# EAGLE board Tilt-A-Whirl_RPI-1031_BOB-v11 (EAGLE 6.2)
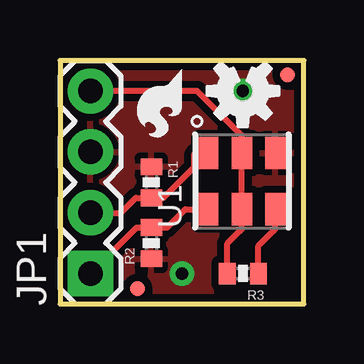
[diagram p0: board, top side]
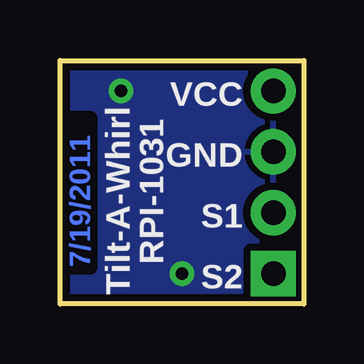
[diagram p1: board, bottom side, seen from below]

Size 10.16 x 10.16 mm. Coordinates in mm from the lower left corner, seen from the top.
Outline: 0,0 10.16,0 10.16,10.16 0,10.16 0,0
Copper layers (1*16): Top 0.035mm / dielectric 1.5mm / Bottom 0.035mm
Design rules: minimum track width 8mil, minimum drill 20mil, track to track 8mil, track to pad 8mil, pad to pad 8mil, via to via 8mil, smd to smd 8mil, copper to edge 8mil, drill to drill 8mil, minimum pad ring 12mil, minimum via ring 10mil, stop-mask expansion 4mil, vias tented up to drill 20mil, thermal gap 10mil

## Footprints (pad centres in the part's own frame; a part is rotated, then mirrored left to right if it is on the bottom)
1X04 = drill 1.016 pad 1.88 square: 1 0,0 | drill 1.016 pad 1.88: 2 2.54,0; 3 5.08,0; 4 7.62,0
FIDUCIAL-1X2.5 = smd 0.635 x 0.635: 1 0,0
0402-RES = smd 0.7 x 0.9: 1 -0.65,0; 2 0.65,0
RPI-1031 = smd 1.35 x 0.85: 1 1.22,1.445; 2 1.22,0.045; 3 1.22,-1.355; 4 -1.13,1.445; 5 -1.13,0.045; 6 -1.13,-1.355

## Placement (x,y rotation side)
JP1  [1X04]  1.27,1.27 90 top
JP2  FIDUCIAL1X2.5  [FIDUCIAL-1X2.5]  9.47,9.55 0 top
JP3  FIDUCIAL1X2.5  [FIDUCIAL-1X2.5]  3.23,0.64 0 top
JP4  LOGO-SFESK  [SFE-LOGO-FLAME]  5.08,9.78 180 top
R1  2.2k  [0402-RES]  3.81,5.08 270 top
R2  2.2k  [0402-RES]  3.81,2.54 90 top
R3  68  [0402-RES]  7.62,1.27 180 top
U1  RPI-1031  [RPI-1031]  7.62,5.08 90 top
U3  CREATIVE_COMMONS  [CREATIVE_COMMONS]  -24.13,-11.43 0 top  (outside the outline)
U$1  OSHW-LOGOS  [OSHW-LOGO-S]  7.62,8.89 180 top

## Library data of the parts
JP1 JP4 R1-R3 U3 U$1 = SparkFun
JP2 JP3 = abes
U1 = Local Lirary

## Nets
5V: JP1.4 R3.2 U1.2 U1.5
AN: R3.1 U1.6
GND: JP1.3 R1.1 R2.1 U1.3
S1: JP1.2 R1.2 U1.1
S2: JP1.1 R2.2 U1.4

## Tracks (layer width: path | path; a pad name or v marks a point on that pad's centre or on a via)
5V
  Top 0.254: R3.2 6.97,2.52 7.49,3.05 7.58,3.13 U1.5 U1.2 7.58,7.03 7.24,7.37 5.71,8.89 JP1.4
AN
  Top 0.254: U1.6 8.97,3.13 8.89,3.05 8.27,2.43 R3.1
GND  (via drill 0.51)
  other vias: 7.62,8.89 5.08,1.27
  pour Top (isolate 0.305): 0,0 0,10.16 10.16,10.16 10.16,0
  pour Bottom (isolate 0.305): 10.16,0 0,0 0,10.16 10.16,10.16
S1
  Top 0.254: JP1.2 2.54,3.81 3.16,4.43 R1.2 4.3,4.43 4.45,4.57 5.59,5.71 5.59,6.22 5.67,6.3 U1.1
S2
  Top 0.254: U1.4 5.22,3.95 5.08,3.81 4.46,3.19 R2.2 3.19,3.19 JP1.1
(copper drawn outside any net)
  shapes: Bottom circle x2, Top circle x2

## Text on the board
Bottom: 7/19/2011
bPlace: VCC | GND | S1 | S2 | RPI-1031 | Tilt-A-Whirl
tNames: Hilary Hoops